# Altium PCB Lower1.1.PcbDoc (part 2 of 2)
Units mil, origin at the board's own origin, x right, y up, seen from the top; angles counter-clockwise.
Board outline 3366.33 x 5314.96 mil, 2 copper layers (Top Layer, Bottom Layer); 114 components, 117 nets, 417 pads, 111 vias.
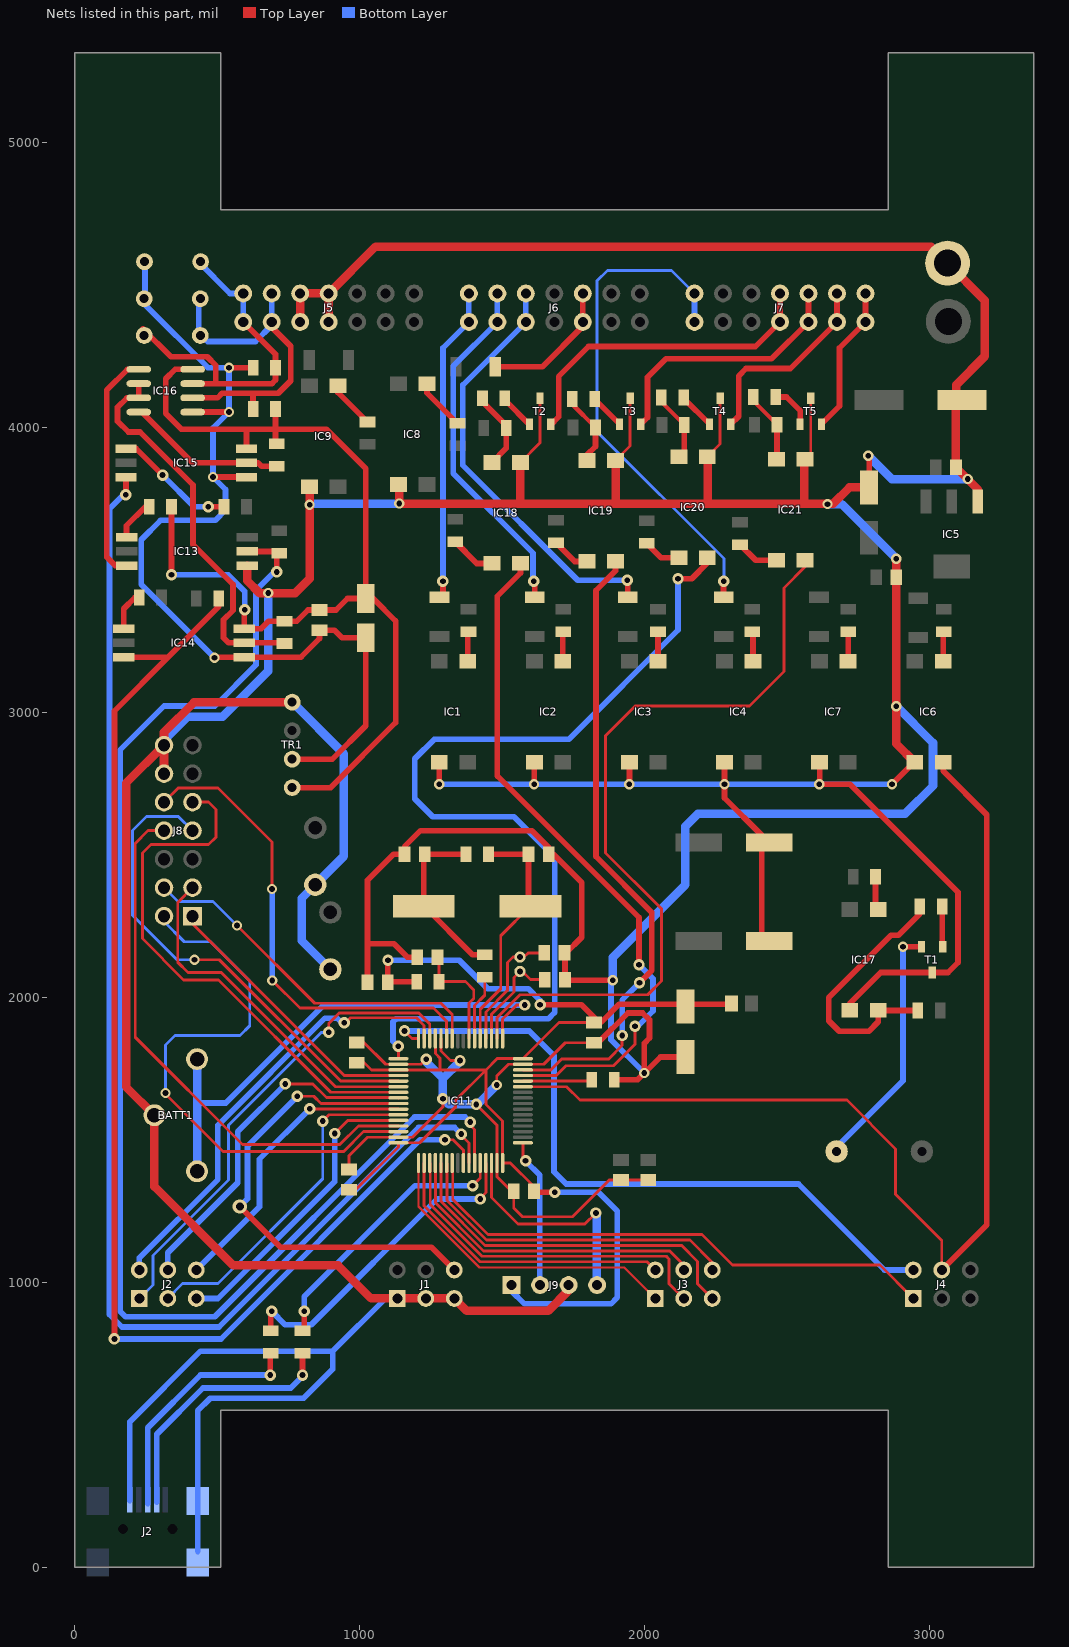
[diagram p2: the nets of this part, all layers, seen from the top]

## Via types
v1: diameter 40, hole 20, Top Layer to Bottom Layer, tented both sides, 64 vias
v2: diameter 36, hole 20, Top Layer to Bottom Layer, tented both sides, 46 vias
v3: diameter 50, hole 28, Top Layer to Bottom Layer, tented both sides, 1 vias

## Nets (pads, with @x,y where several pads share a name; then routed paths per layer and width w, separated by ;. In a path a pad name is that pad's centre, name@x,y a point inside that pad or via, vN(x,y) a via of type N, cw(c..) or ccw(c..) an arc to the next point about the centre after c; other vN are vias at no path point) (continued)
GND: B2.1 BATT1.2 C1.2 C2.2 C3.2 C4.2 C5.1 C6.2 C7.2 C8.2 C9.2 C10.2 C11.1 C12.1 C13.2 C14.2 C17.2 C18.2 C19.2 C20.2 C21.2 C22.2 C23.2 IC1.3 IC2.3 IC3.3 IC4.3 IC5.1 IC6.3 IC7.3 IC8.3 IC9.3 IC11.12 IC11.18 IC11.31 IC11.47 IC11.63 IC13.4 IC17.3 IC18.3 IC19.3 IC20.3 IC21.3 J1.1 J1.3 J1.5 J2.5@192.91,236.22 J2.6@431.1,15.75 J2.6@431.1,232.28 J5.5 J5.6 J5.7 J5.8 J8.12 J8.14 J9.3 R12.1 T1.3 T2.3 T3.3 T4.3 T5.3 TR1.1 | length 29514.4
  Top Layer w10: C8.2@962,1395.43 962,1444 1027.05,1509.05 IC11.31@1135.5,1509.05 1185.05,1509.05 1292,1616 v1(1292,1644) ; C21.2@994,1843.43 1012.57,1843.43 1091.05,1764.95 IC11.18@1135.5,1764.95 1214.95,1764.95 v1(1233,1783) ; IC11.12@1285.1,1855.5 1285.1,1811.21 1318.31,1778 v1(1352,1778) ; v1(1409,1624) 1481.95,1551.05 IC11.47@1481.95,1418.5 1481.95,1370.05 C7.2@1536.78,1315.22 ; v2(1481,1692) 1481,1724 1521.95,1764.95 IC11.63@1572.5,1764.95 1645.95,1764.95 1721.57,1840.57 C10.2@1822,1840.57 C10.2@1836.57,1840.57 ; C7.2@1540.57,1319 1540.57,1260.43 1571,1230 1747,1230 1875.57,1358.57 C23.2@1917,1358.57 C22.2@2013,1358.57 ; IC18.3@1564,3877.17 1633,3946.17 T2.3@1633,4102.28 ; IC19.3@1898,3884.17 1949,3935.17 T3.3@1949,4102.28 ; IC20.3@2220,3897.17 2265,3942.17 T4.3@2265,4102.28 ; IC21.3@2563,3888.17 2583,3908.17 T5.3@2583,4102.28
  Top Layer w20: C9.2@1027.57,2053 1027.57,2410.57 1119,2502 C14.2@1157.57,2502 1157.57,2529.57 1213,2585 1604,2585 1663.43,2525.57 C11.1@1663.43,2502 1680,2502 1779,2403 1779,2211 1724,2156 C13.2@1718.43,2156 1720.43,2154 C12.1@1720.43,2062 1722.43,2060 v2(1888,2060) ; 1032,2188 1120,2188 1167,2141 C5.1@1201.57,2141 ; IC8.3@1136,3799.83 IC8.3@1139,3796.83 ; v2(1139,3733) 1147,3733 v2@1148,3732 ; v2(1279,2748) IC1.3@1279,2824.83 ; 1564,3736 1568,3732 ; v2(1612,2748) 1612.8,2748.8 IC2.3@1612.8,2824.83 ; C10.2@1836.57,1840.57 1941,1945 1993,1945 2017,1921 2017,1857 1999,1839 v2(1999,1734) ; R12.1@1893.37,1711 1976,1711 v2(1999,1734) ; 1898,3733 1899,3732 ; v2(1946,2748) 1946.6,2748.6 IC3.3@1946.6,2824.83 ; C6.2@2143,1790.42 2055.42,1790.42 v2(1999,1734) ; IC20.3@2220,3897.17 IC20.3@2221,3896.17 ; IC4.3@2280.4,2824.83 2280.4,2699.6 2411.02,2568.98 C20.2@2411.02,2196 ; IC21.3@2560,3885.17 IC21.3@2563,3888.17 ; IC7.3@2614.2,2824.83 2614.2,2749.2 v2(2613,2748) 2721,2748 3100,2369 3100,2122 3064.72,2086.72 T1.3@3009,2086.72 2828.72,2086.72 2720,1978 IC17.3@2720,1953.83 ; v2(2785,3901) 2788,3898 C3.2@2788,3789.58 ; v2(2868,2748) 2944.83,2824.83 IC6.3@2948,2824.83
  Top Layer w30: J8.12@313,2785 J8.14@313,2885 ; IC13.4@604.42,3515 604.42,3462.58 649,3418 773,3418 824,3469 v2(824,3729) IC9.3@824,3791.83 ; TR1.1@763,3035 418,3035 313,2930 J8.14@313,2885 ; J5.5@791,4370.47 J5.6@791,4470.47 J5.8@891,4470.47 ; J5.7@891,4370.47 J5.8@891,4470.47 ; v2(1139,3733) IC8.3@1139,3796.83 ; v2@1148,3732 1568,3732 1899,3732 2221,3732 ; 1564,3736 IC18.3@1564,3877.17 ; J9.3@1732,998 1732,970 1662,900 1374.92,900 J1.5@1331.92,943 J1.3@1231.92,943 J1.1@1131.92,943 1040,943 924,1059 556,1059 279.39,1335.61 BATT1.2@279.39,1586.15 180,1685.54 180,2752 J8.14@313,2885 ; 1898,3733 IC19.3@1898,3884.17 ; IC20.3@2221,3896.17 2221,3732 ; IC21.3@2560,3885.17 2560,3732 ; C3.2@2788,3789.58 2718.58,3789.58 2661,3732 2560,3732 ; v2(2883.43,3539.57) C4.2@2883.43,3474 2883.43,2889.4 IC6.3@2948,2824.83 ; IC5.1@3168.55,3740.17 3168.55,3783.88 C2.2@3092.43,3860 3092.43,4074.76 C1.2@3113.67,4096 3094,4115.67 3094,4150 3194,4250 3194,4446 B2.1@3063,4577 3005,4635 1055.53,4635 J5.8@891,4470.47 ; 2221,3732 2560,3732
  Bottom Layer w10: J1.1@1131.92,921.92 J1.1@1131.92,943 ; v1@1233,1774 v1(1233,1783) ; v1(1409,1624) v1@1413,1624
  Bottom Layer w15: v2@1882,2054 v2(1888,2060)
  Bottom Layer w20: J2.5@192.91,233 192.91,248.03 192.91,509.91 441,758 905,758 ; J8.14@313,2885 J8.14@313,2902 ; J2.6@431.1,54.53 431.1,244.1 431.1,549.1 475,593 803,593 905,695 905,758 ; v2(824,3729) v2@828,3733 ; J1.1@1131.92,943 1090,943 905,758 ; v2(1279,2748) v2(1612,2748) v2(1946,2748) v2(2280,2748) v2(2613,2748) v2(2868,2748) ; v2@1882,2054 1882,1851 v2(1999,1734)
  Bottom Layer w30: J8.14@313,2902 395.5,2984.5 518.5,2984.5 679,3145 v2(679,3419) ; TR1.1@763,3036 944,2855 944,2495 C17.2@844,2395 796,2347 796,2199 C18.2@897,2098 ; v2@828,3733 v2(1139,3733) ; v1@1233,1774 1292,1715 ; v1@1349,1772 1292,1715 ; v1(1409,1624) 1312,1624 v1(1292,1644) 1292,1715 ; v1@1413,1624 v2(1481,1692) ; v2(1888,2060) 1888,2140 2142.5,2394.5 2142.5,2599.5 2187,2644 2914,2644 3012,2742 3012,2893 v2(2883,3022) ; v2(2642,3731) 2692,3731 v2(2883.43,3539.57) ; v2(2785,3901) 2867,3819 v2(3134,3819)
GND24: 
GND485: C15.2 C16.2 IC14.4 IC15.4 IC16.5 MOV2.1 MOV3.1 R27.2 TR1.3 | length 3473.6
  Top Layer w10: v2(490,3192) v2@492,3194
  Top Layer w20: IC16.5@413.49,4054 v2(541,4054) ; v2(485,3826) IC15.4@602.42,3826 ; v2@492,3194 IC14.4@594.42,3194 794,3194 859,3259 C16.2@859,3288.57 911.43,3288.57 937.9,3262.1 C15.2@1021,3262.1 1021,2953 904,2836 TR1.3@763,2836 ; v2(541,4210) R27.2@625.63,4210
  Bottom Layer w20: MOV2.1@239.57,4570 246,4563.57 246,4431 467,4210 v2(541,4210) v2(541,4054) 485,3998 v2(485,3826) 529,3782 529,3710 493,3674 301,3674 233,3606 233,3449 v2(490,3192)
IN_1: D1.1 J6.1 J6.2 | length 1101.2
  Top Layer w20: D1.1@1280,3403.9 1292,3415.9 v1(1292,3460)
  Bottom Layer w20: v1@1292,3468 1292,4279.47 J6.1@1383,4370.47 J6.2@1383,4470.47
IN_2: D2.1 J6.3 J6.4 | length 1256
  Top Layer w20: v1(1611,3460) 1614,3457 D2.1@1614,3403.9
  Bottom Layer w20: J6.4@1483,4470.47 J6.3@1483,4370.47 1328,4215.47 1328,3839 1608,3559 v1@1608,3452
IN_3: D3.1 J6.5 J6.6 | length 1508.4
  Top Layer w20: v1(1939,3464) 1941,3462 D3.1@1941,3403.9
  Bottom Layer w10: J6.6@1583,4470.47 J6.6@1583,4479
  Bottom Layer w20: J6.6@1583,4470.47 J6.5@1583,4370.47 1362,4149.47 1362,3867 1765,3464 v1(1939,3464)
IN_4: D4.1 J7.1 J7.2 | length 1786.1
  Top Layer w20: D4.1@2277,3403.9 2277,3459 v1(2278,3460)
  Bottom Layer w10: J7.2@2175,4470.47 2094.47,4551 1869,4551 1833,4515 1833,3985 2278,3540 v1(2278,3460)
  Bottom Layer w20: J7.1@2175,4370.47 J7.2@2175,4470.47
LCD_BL: IC11.39 J4.1 | length 1889.2
  Top Layer w10: IC11.39@1324.47,1418.5 1326.25,1416.72 1326.25,1290.83 1450.08,1167 2201,1167 2308,1060 2826,1060 J4.1@2943,943
LCD_D1: IC11.33 J3.1 | length 1117.6
  Top Layer w8: IC11.33@1206.36,1418.5 1206.36,1265.64 1420,1052 1928.46,1052 J3.1@2037.46,943
LCD_D2: IC11.34 J3.2 | length 1054.8
  Top Layer w10: IC11.34@1226.05,1418.5 1226.05,1268.58 1422.63,1072 2008.46,1072 J3.2@2037.46,1043
LCD_D3: IC11.35 J3.3 | length 1223.9
  Top Layer w10: IC11.35@1245.73,1418.5 1247.51,1416.72 1247.51,1272.49 1429,1091 1447,1091 2076,1091 2086,1081 2086,994.46 J3.3@2137.46,943
LCD_D4: IC11.36 J3.4 | length 1119.8
  Top Layer w10: IC11.36@1265.42,1418.5 1265.42,1278.62 1434.04,1110 2088,1110 2137.46,1060.54 J3.4@2137.46,1043
LCD_E: IC11.37 J3.5 | length 1274.2
  Top Layer w10: IC11.37@1285.1,1418.5 1285.1,1283.9 1440,1129 1467,1129 2130,1129 2186,1073 2186,994.46 J3.5@2237.46,943
LCD_RS: IC11.38 J3.6 | length 1180
  Top Layer w10: IC11.38@1304.79,1418.5 1306.57,1416.72 1306.57,1286.48 1445.04,1148 1477,1148 2159,1148 2237.46,1069.54 J3.6@2237.46,1043
LED_AUTO: IC11.24 J2.4@326.38,1043 | length 1240.8
  Top Layer w10: v1(739,1696) 835,1696 883,1648 1134.34,1648 IC11.24@1135.5,1646.84
  Bottom Layer w20: J2.4@326.38,1043 326.38,1103.38 572,1349 572,1529 v1(739,1696)
LED_Fault: IC11.28 J2.5@426.38,943 | length 1067
  Top Layer w10: v1(912,1522) 958.1,1568.1 IC11.28@1135.5,1568.1
  Bottom Layer w20: J2.5@426.38,943 502,943 912,1353 v1(912,1522)
LED_Healty: IC11.16 J4.2 | length 2432.3
  Top Layer w10: v1(1157,1882) 1183.5,1855.5 IC11.16@1206.36,1855.5
  Bottom Layer w20: v1(1157,1882) 1595,1882 1682,1795 1682,1388 1725,1345 2540,1345 2842,1043 J4.2@2943,1043
LED_MANUAL: IC11.25 J1.6 | length 1680.5
  Top Layer w10: v1(781,1652.5) 838.5,1652.5 863.84,1627.16 IC11.25@1135.5,1627.16
  Top Layer w20: v3(579,1266) 722,1123 1251.92,1123 J1.6@1331.92,1043
  Bottom Layer w20: v3(579,1266) 606,1293 606,1477.5 v1(781,1652.5)
LED_OUT1: IC11.26 J2.6@426.38,1043 | length 1042.2
  Top Layer w10: v1(825,1609) 826.53,1607.47 IC11.26@1135.5,1607.47
  Bottom Layer w20: J2.6@426.38,1043 648,1264.62 648,1432 v1(825,1609)
LED_OUT2: IC11.27 J2.3@326.38,943 | length 1194.8
  Top Layer w10: v1(870,1565.5) 892.29,1587.79 IC11.27@1135.5,1587.79
  Bottom Layer w10: J2.3@326.38,943 378.38,995 502,995 870,1363 v1(870,1565.5)
LED_S1: IC11.14 J2.1@226.38,943 | length 1692.4
  Top Layer w10: v1(891,1877) 891,1908 928,1945 1207,1945 1245.73,1906.27 IC11.14@1245.73,1855.5
  Bottom Layer w10: J2.1@226.38,943 274,990.62 274,1094 539,1359 539,1551 865,1877 v1(891,1877)
LED_S2: IC11.15 J2.2@226.38,1043 | length 1577.9
  Top Layer w10: v1(946,1911) 946,1907 967,1928 1199,1928 1226.05,1900.95 IC11.15@1226.05,1855.5
  Bottom Layer w10: v1@936,1911 v1(946,1911)
  Bottom Layer w20: J2.2@226.38,1043 226.38,1085.38 502,1361 502,1551 878,1927 920,1927 v1@936,1911
man_auto: IC6.4 IC11.59 J4.4 | length 3801.6
  Top Layer w10: IC11.59@1572.5,1686.21 1725.79,1686.21 1773,1639 2710,1639 2881,1468 2881,1309 3043,1147 J4.4@3043,1043
  Top Layer w20: J4.4@3043,1043 3201,1201 3201,2641 3048,2794 IC6.4@3048,2824.83
MCU_VCC: C6.1 C7.1 C8.1 C9.1 C10.1 C21.1 IC11.13 IC11.19 IC11.32 IC11.48 IC11.64 J9.1 L1.2 R11.2 | length 4799
  Top Layer w10: C8.1@962,1324.57 985.57,1324.57 1135.5,1474.5 IC11.32@1135.5,1489.36 1210.36,1489.36 1337,1616 1337,1639 1443.27,1745.27 ; C21.1@994,1772.57 1013.43,1772.57 1040.73,1745.27 IC11.19@1135.5,1745.27 1282,1745.27 ; C9.1@1098.43,2053 C9.1@1100.43,2055 ; v1@1098.43,2129.43 v1(1099,2130) ; IC11.13@1265.42,1855.5 1265.42,1802.58 1282,1786 1282,1745.27 ; 1443.01,1703.27 1443.27,1703.27 ; C7.1@1614.43,1316 C7.1@1611.43,1319 1611.43,1335.57 1528.5,1418.5 IC11.48@1501.64,1418.5 1501.64,1565.36 1443.27,1623.73 1443.27,1703.27 ; C10.1@1846.57,1912 1824,1912 1699.87,1912 IC11.64@1572.5,1784.64 1482.64,1784.64 1443.27,1745.27 ; L1.2@2302.15,1975.58 L1.2@2304.57,1978 ; 1282,1745.27 1443.27,1745.27 ; 1443.27,1703.27 1443.27,1745.27
  Top Layer w20: C9.1@1098.43,2053 v1@1098.43,2129.43 ; C9.1@1100.43,2055 R11.2@1199.63,2055 ; C7.1@1614.43,1316 v1(1684,1316) ; v1(1633,1974) 1778,1974 1824,1928 C10.1@1824,1912 ; C10.1@1846.57,1912 1910.15,1975.58 L1.2@2302.15,1975.58
  Bottom Layer w10: v1@1633,1966 v1(1633,1974)
  Bottom Layer w20: v1(1099,2130) 1349,2130 1449,2030 1592,2030 1633,1989 v1(1633,1974) ; J9.1@1532,998 1532,970 1578,924 1882,924 1904,946 1904,1250 1838,1316 v1(1684,1316)
NetIC1_1: IC1.1 R1.1 | length 105.7
  Top Layer w10: R1.1@1379,3280.63 R1.1@1382,3283.63
  Top Layer w20: IC1.1@1379,3179.17 R1.1@1379,3280.63
NetIC2_1: IC2.1 R2.1 | length 105
  Top Layer w10: R2.1@1712.8,3282.43 R2.1@1714,3283.63
  Top Layer w20: IC2.1@1712.8,3179.17 R2.1@1712.8,3282.43
NetIC3_1: IC3.1 R3.1 | length 104.6
  Top Layer w10: R3.1@2046.6,3283.23 R3.1@2047,3283.63
  Top Layer w20: IC3.1@2046.6,3179.17 R3.1@2046.6,3283.23
NetIC4_1: IC4.1 R4.1 | length 105.5
  Top Layer w10: R4.1@2378,3283.63 R4.1@2380.4,3281.23
  Top Layer w20: IC4.1@2380.4,3179.17 R4.1@2380.4,3281.23
NetIC6_1: IC6.1 R7.1 | length 105.3
  Top Layer w10: R7.1@3048,3281.63 R7.1@3050,3283.63
  Top Layer w20: IC6.1@3048,3179.17 R7.1@3048,3281.63
NetIC7_1: IC7.1 R8.1 | length 104.8
  Top Layer w10: R8.1@2714.2,3282.83 R8.1@2715,3283.63
  Top Layer w20: IC7.1@2714.2,3179.17 R8.1@2714.2,3282.83
NetIC8_1: IC8.1 R9.1 | length 184.1
  Top Layer w20: IC8.1@1236,4154.17 1236,4121.37 R9.1@1343,4014.37
NetIC9_1: IC9.1 R10.1 | length 169.5
  Top Layer w10: IC9.1@924,4122.37 IC9.1@924,4146.17
  Top Layer w20: IC9.1@924,4122.37 R10.1@1027,4019.37
NetIC10_1: BATT1.1 BATT1.3 IC11.1 | length 1853.4
  Top Layer w10: IC11.1@1501.64,1855.5 1501.64,1923.55 1520.52,1942.44 1520.52,1942.52 1551,1973 v1(1579,1973)
  Bottom Layer w10: 429,1626 432,1629
  Bottom Layer w20: 432,1629 529.89,1629 873.89,1973 v1(1579,1973)
  Bottom Layer w30: BATT1.3@429,1389.3 429,1626 BATT1.1@429,1783
NetIC11_6: IC11.6 R13.2 | length 229.9
  Top Layer w10: IC11.6@1403.21,1855.5 1403.21,1971.21 1439,2007 R13.2@1439,2070.63
NetIC11_60: IC11.60 R12.2 | length 250.5
  Top Layer w10: IC11.60@1572.5,1705.9 R12.2@1823,1705.9
NetIC13_1: IC13.1 R19.1 | length 147.1
  Top Layer w20: IC13.1@181.58,3615 181.58,3655.58 248,3722 R19.1@260.63,3722
NetIC13_3: IC13.3 IC16.1 | length 810.8
  Top Layer w10: IC16.1@185,4204 IC16.1@224.51,4204
  Top Layer w20: IC13.3@181.58,3515 142,3515 112,3545 112,4131 IC16.1@185,4204
NetIC14_1: IC14.1 R17.1 | length 140
  Top Layer w10: R17.1@211,3403 R17.1@225.63,3403
  Top Layer w20: IC14.1@171.58,3294 171.58,3363.58 R17.1@211,3403
NetIC14_5: IC14.5 IC16.2 IC16.3 R20.1 | length 1375.1
  Top Layer w10: IC16.3@183,4104 IC16.3@224.51,4104 ; R20.1@733.63,3244 R20.1@736,3241.63
  Top Layer w20: IC16.3@183,4104 150,4071 150,4022 188,3984 229,3984 415,3798 415,3589 555,3449 555,3358 522,3325 522,3262 540,3244 IC14.5@594.42,3244 R20.1@733.63,3244 ; IC16.3@224.51,4104 IC16.2@224.51,4154
NetIC15_1: IC15.1 R18.1 | length 428.5
  Top Layer w10: IC15.1@179.58,3926 IC15.1@215,3926
  Top Layer w20: IC15.1@215,3926 v1(308,3833) ; v1(468,3722) R18.1@523.63,3722
  Bottom Layer w20: v1(308,3833) 419,3722 v1(468,3722)
NetIC15_5: IC15.5 IC16.4 R21.1 | length 563.3
  Top Layer w10: IC16.4@224.51,4054 IC16.4@235,4054
  Top Layer w20: IC16.4@235,4054 413,3876 IC15.5@602.42,3876 643,3876 655.37,3863.63 R21.1@709,3863.63
NetIC17_1: IC17.1 R22.1 | length 118.8
  Top Layer w10: IC17.1@2810.37,2317.8 IC17.1@2820,2308.17
  Top Layer w20: IC17.1@2810.37,2317.8 R22.1@2810.37,2423
NetIC17_4: IC17.4 R29.1 R30.2 | length 930.4
  Top Layer w10: R29.1@2958.46,1953.83 R29.1@2958.63,1954 ; R30.2@2965.63,2292.63 R30.2@2965.63,2319
  Top Layer w20: R29.1@2958.46,1953.83 IC17.4@2820,1953.83 2820,1914 2787,1881 2683,1881 2646,1918 2646,1999.37 2864.63,2218 2891,2218 R30.2@2965.63,2292.63
NetIC18_1: IC18.1 R23.1 | length 160.4
  Top Layer w20: R23.1@1335,3598.63 1410.8,3522.83 IC18.1@1464,3522.83
NetIC18_4: IC18.4 R31.1 R35.2 | length 281.4
  Top Layer w10: R35.2@1430.63,4090.37 R35.2@1430.63,4103
  Top Layer w20: R35.2@1430.63,4090.37 1514.37,4006.63 R31.1@1514.37,3998 1514.37,3927.54 IC18.4@1464,3877.17
NetIC19_1: IC19.1 R24.1 | length 136.3
  Top Layer w20: R24.1@1689,3595.63 1754.8,3529.83 IC19.1@1798,3529.83
NetIC19_4: IC19.4 R32.1 R36.2 | length 261.9
  Top Layer w10: R36.2@1745.63,4081.74 R36.2@1745.63,4100 ; IC19.4@1798,3884.17 IC19.4@1798,3904
  Top Layer w15: R36.2@1745.63,4081.74 R32.1@1827.37,4000
  Top Layer w20: IC19.4@1798,3904 1827.37,3933.37 R32.1@1827.37,4000
NetIC20_1: IC20.1 R25.1 | length 134
  Top Layer w20: R25.1@2007,3593.63 2057.8,3542.83 IC20.1@2120,3542.83
NetIC20_4: IC20.4 R33.1 R37.2 | length 249.3
  Top Layer w10: IC20.4@2120,3897.17 IC20.4@2139.37,3916.54
  Top Layer w15: R37.2@2058.63,4089.74 R33.1@2139.37,4009
  Top Layer w20: R37.2@2058.63,4089.74 R37.2@2058.63,4105 ; IC20.4@2139.37,3916.54 R33.1@2139.37,4009
NetIC21_1: IC21.1 R26.1 | length 150.7
  Top Layer w20: R26.1@2335,3588.63 2389.8,3533.83 IC21.1@2463,3533.83
NetIC21_4: IC21.4 R34.1 R38.2 | length 253.7
  Top Layer w8: IC21.4@2463,3888.17 IC21.4@2464.37,3889.54
  Top Layer w15: R38.2@2381.63,4092.74 R34.1@2464.37,4010
  Top Layer w20: R38.2@2381.63,4092.74 R38.2@2381.63,4107 ; IC21.4@2464.37,3889.54 R34.1@2464.37,4010
NetJ2_2: J2.2@287.4,236.22 R5.2 | length 911
  Top Layer w20: v1(799,674) R5.2@799,750.63
  Bottom Layer w20: J2.2@287.4,228 J2.2@287.4,236.22 287.4,466.4 450,629 758,629 v1@799,670
NetJ2_3: J2.3@255.91,236.22 R6.2 | length 856.1
  Top Layer w10: R6.2@686,753.63 R6.2@688,755.63
  Top Layer w20: v1(686,674) R6.2@686,753.63
  Bottom Layer w20: J2.3@255.91,222 255.91,248.03 255.91,488.91 441,674 v1(686,674)
NetLS1_2: LS1.2 T1.2 | length 871.3
  Top Layer w20: v2(2907,2177) 2971.32,2177 T1.2@2971.6,2177.28
  Bottom Layer w20: LS1.2@2669,1469 2907,1707 v2(2907,2177)
NetR30_1: R30.1 T1.1 | length 142.6
  Top Layer w10: T1.1@3044.37,2179.31 T1.1@3046.4,2177.28
  Top Layer w20: T1.1@3044.37,2179.31 R30.1@3044.37,2319
NetR35_1: R35.1 T2.1 | length 129
  Top Layer w10: R35.1@1509.37,4095.95 R35.1@1509.37,4103
  Top Layer w20: R35.1@1509.37,4095.95 T2.1@1595.6,4009.72
NetR36_1: R36.1 T3.1 | length 124.4
  Top Layer w10: T3.1@1911.6,4011.72 T3.1@1911.6,4012.77
  Top Layer w20: R36.1@1824.37,4100 T3.1@1911.6,4012.77
NetR37_1: R37.1 T4.1 | length 130.6
  Top Layer w10: R37.1@2137.37,4101.95 R37.1@2137.37,4105
  Top Layer w20: R37.1@2137.37,4101.95 T4.1@2227.6,4011.72
NetR38_1: R38.1 T5.1 | length 152.6
  Top Layer w20: R38.1@2460.37,4107 2498,4107 2545.6,4059.4 T5.1@2545.6,4011.72
NetR39_1: 
OSC1: C11.2 IC11.5 Q2.2 R16.1 | length 862.8
  Top Layer w10: IC11.5@1422.9,1855.5 1422.9,1957.9 1495,2030 1495,2216.32 Q2.2@1599.01,2320.33 Q2.2@1592.57,2326.77
  Top Layer w20: R16.1@1451.84,2502 C11.2@1592.57,2502 Q2.2@1592.57,2326.77
OSC2: C14.1 Q2.1 R13.1 R16.2 | length 613.9
  Top Layer w10: C14.1@1224.99,2499.88 C14.1@1228.43,2503.33
  Top Layer w20: C14.1@1224.99,2499.88 Q2.1@1224.99,2320.33 1395.95,2149.37 R13.1@1439,2149.37 ; C14.1@1228.43,2502 R16.2@1373.1,2502
OSC32_1: C12.2 IC11.3 Q1.1 | length 376.4
  Top Layer w10: IC11.3@1462.27,1855.5 1462.27,1940.27 1541,2019 1541,2070 Q1.1@1562,2091 1570.32,2091 1599.32,2062 C12.2@1649.57,2062
OSC32_2: C13.1 IC11.4 Q1.2 | length 440.8
  Top Layer w10: IC11.4@1442.58,1855.5 1442.58,1948.58 1519,2025 1519,2122 1538,2141 Q1.2@1562,2141 1576.31,2141 1591.31,2156 C13.1@1647.57,2156
Relay_Fault1: J7.11 J7.12 T4.2 | length 704.2
  Top Layer w20: T4.2@2302.4,4011.72 2330,4039.32 2330,4181 2356,4207 2511.53,4207 J7.11@2675,4370.47 J7.12@2675,4470.47
Relay_Fault2: J7.13 J7.14 T5.2 | length 522.8
  Top Layer w20: T5.2@2620.4,4011.72 2684,4075.32 2684,4279.47 J7.13@2775,4370.47 J7.14@2775,4470.47
Relay_S1: J7.7 J7.8 T2.2 | length 1137
  Top Layer w20: T2.2@1670.4,4009.72 1698,4037.32 1698,4179 1803,4284 2388.53,4284 J7.7@2475,4370.47 J7.8@2475,4470.47
Relay_S2: J7.9 J7.10 T3.2 | length 919.6
  Top Layer w20: T3.2@1986.4,4011.72 2010,4035.32 2010,4176 2075,4241 2445.53,4241 J7.9@2575,4370.47 J7.10@2575,4470.47
Relayfault1: IC11.17 IC20.2 | length 3413.9
  Top Layer w10: v1(1135,1828) 1135.5,1827.5 IC11.17@1135.5,1784.64
  Top Layer w20: v1(2117,3469) 2165,3469 2220,3524 IC20.2@2220,3542.83
  Bottom Layer w20: v1(1135,1828) 1117,1846 1117,1914 1128,1925 1662,1925 1684,1947 1684,2491 1541,2634 1256,2634 1193,2697 1193,2837 1262,2906 1734,2906 2117,3289 v1(2117,3469)
Relayfault2: IC11.2 IC21.2 | length 2785.8
  Top Layer w10: IC11.2@1481.95,1855.5 1481.95,1927.99 1543.96,1990 1544.04,1990 1563.04,2009 2011,2009 2059,2057 2059,2311 1863,2507 1863,2918 1967,3022 2368,3022 2489,3143 2489,3437 2563,3511 IC21.2@2563,3533.83
Reset: C5.2 IC11.7 R11.1 | length 399.4
  Top Layer w10: C5.2@1272.43,2141 1278.37,2135.06 R11.1@1278.37,2055 1371,2055 1400,2026 1400,1996 1383.53,1979.53 IC11.7@1383.53,1855.5
RS485_A: IC16.7 J5.1 J5.2 MOV1.1 MOV2.2 R27.1 | length 1218.9
  Top Layer w20: MOV1.1@239.57,4346 337.57,4248 465,4248 495,4218 495,4154 ; IC16.7@413.49,4154 495,4154 ; J5.1@591,4370.47 704.37,4257.1 R27.1@704.37,4210 704.37,4166.37 692,4154 495,4154
  Bottom Layer w20: MOV2.2@436.43,4578.57 544.53,4470.47 J5.2@591,4470.47 J5.1@591,4370.47
RS485_B: IC16.6 J5.3 J5.4 MOV1.2 MOV3.2 R28.2 | length 1181.6
  Top Layer w10: J5.3@691,4352 J5.3@691,4370.47
  Top Layer w20: IC16.6@413.49,4104 501,4104 517,4120 625,4120 ; R28.2@625.63,4065 625.63,4119.37 625,4120 ; J5.3@691,4352 758,4285 758,4164 714,4120 625,4120
  Bottom Layer w20: MOV3.2@435.43,4452 435.43,4347 436.43,4346 436.43,4331.57 466,4302 634,4302 691,4359 J5.3@691,4370.47 J5.4@691,4470.47
RS485_direct: IC11.41 IC14.3 R15.1 | length 4481.5
  Top Layer w10: v1(1299,1500) 1327,1500 1363.84,1463.16 IC11.41@1363.84,1418.5
  Top Layer w20: v1(139,801) 139,3005 328,3194 ; IC14.3@171.58,3194 328,3194 ; R15.1@505.37,3400 505.37,3371.37 328,3194
  Bottom Layer w20: v1(139,801) 513,801 1212,1500 v1(1299,1500)
RS485_Rx: IC11.43 IC13.5 R14.1 | length 4801
  Top Layer w10: R14.1@709,3550.63 R14.1@717,3558.63 R14.1@710.63,3565 ; v1(1388,1562) 1388,1551 1403.21,1535.79 IC11.43@1403.21,1418.5
  Top Layer w20: IC13.5@604.42,3565 R14.1@710.63,3565 ; v1(709,3493) R14.1@709,3550.63
  Bottom Layer w10: v1@700,3493 v1(709,3493)
  Bottom Layer w20: v1@700,3493 636,3429 636,3167 491.5,3022.5 313.5,3022.5 159,2868 159,898 178,879 491,879 1192,1580 1370,1580 v1(1388,1562)
RS485_Tx: IC11.42 IC15.3 | length 4626.9
  Top Layer w10: v1(179,3764) v1@179.58,3764.58 ; v1@1357,1515 1383.53,1488.47 IC11.42@1383.53,1418.5
  Top Layer w20: v1@179.58,3764.58 IC15.3@179.58,3826
  Bottom Layer w10: v1@171,3764 v1(179,3764)
  Bottom Layer w20: v1@171,3764 122,3715 122,895 122,886.66 165.66,843 506,843 1206,1543 1333,1543 v1(1356,1520)
S1_Select: IC11.61 IC18.2 | length 2417.8
  Top Layer w10: IC11.61@1572.5,1725.58 1689.58,1725.58 1724,1760 1891.04,1760 1966,1834.96 v1(1966,1898)
  Top Layer w20: IC18.2@1564,3522.83 1564,3489 1483,3408 1483,2777 1980,2280 v1(1980,2114)
  Bottom Layer w10: v1(1966,1898) v1@1975,1898
  Bottom Layer w20: v1@1975,1898 2029,1952 2029,2065 v1(1980,2114)
S2_Select: IC11.62 IC19.2 | length 2235.7
  Top Layer w10: IC11.62@1572.5,1745.27 1670.27,1745.27 1709,1784 1874,1784 1921,1831 v1(1921,1866)
  Top Layer w20: IC19.2@1898,3529.83 1898,3497 1829,3428 1829,2494 2025,2298 2025,2094 v1(1982,2051)
  Bottom Layer w20: v1(1921,1866) 1921,1990 v1(1982,2051)
SPI1_CS1: IC11.20 J8.1 | length 970
  Top Layer w10: J8.1@413,2285 413,2258 945.42,1725.58 IC11.20@1135.5,1725.58
SPI1_MISO: IC11.22 J8.3 | length 1239
  Top Layer w10: J8.3@413,2385 361,2333 361,2123 397,2087 514,2087 914.79,1686.21 IC11.22@1135.5,1686.21
SPI1_MOSI: IC11.23 J8.9 | length 1892.9
  Top Layer w10: J8.9@413,2685 469,2685 495,2659 495,2562 469,2536 267,2536 237,2506 237,2206 382,2061 504,2061 898.47,1666.53 IC11.23@1135.5,1666.53
SPI1_SCK: IC11.21 J8.7 | length 1724
  Top Layer w10: v2(420,2132) 507,2132 933.1,1705.9 IC11.21@1135.5,1705.9
  Bottom Layer w10: J8.7@413,2585 363,2635 252,2635 202,2585 202,2288 358,2132 v2(420,2132)
SPI2_CLK: IC11.29 J8.8 | length 1906.4
  Top Layer w10: J8.8@313,2585 257,2585 212,2540 212,1860 589,1483 930,1483 995.42,1548.42 IC11.29@1135.5,1548.42
SPI2_CS: IC11.30 J8.2 | length 1993
  Top Layer w10: v2(318,1664) 315,1664 520,1459 944,1459 1013.73,1528.73 IC11.30@1135.5,1528.73
  Bottom Layer w10: J8.2@313,2285 313,2266 384,2195 476,2195 614,2057 614,1900 580,1866 352,1866 318,1832 v2(318,1664)
SPI2_MISO: IC11.10 J8.4 | length 1280
  Top Layer w10: v2(569,2252) 842,1979 1285,1979 1324.47,1939.53 IC11.10@1324.47,1855.5
  Bottom Layer w10: J8.4@313,2385 362,2336 485,2336 v2(569,2252)
SPI2_MOSI: IC11.11 J8.10 | length 1696.5
  Top Layer w10: J8.10@313,2685 363,2735 502,2735 692,2545 v2(692,2380) ; v2(693,2059) 790,1962 1259,1962 1304.79,1916.21 IC11.11@1304.79,1855.5
  Bottom Layer w10: v2(692,2380) v2@693,2379
  Bottom Layer w20: v2(693,2059) v2@693,2379
SWCLK: IC11.49 J9.2 | length 516
  Top Layer w10: IC11.49@1572.5,1489.36 1572.5,1435.5 v1(1582,1426)
  Bottom Layer w20: v1(1582,1426) 1632,1376 J9.2@1632,998
SWDIO: IC11.46 J9.4 | length 788.7
  Top Layer w10: IC11.46@1462.27,1418.5 1462.27,1297.73 1556,1204 1790,1204 v1(1829,1243)
  Bottom Layer w30: v1(1829,1243) 1832,1240 J9.4@1832,998
UP_btn: D8.1 J6.9 J6.10 | length 481.4
  Top Layer w10: J6.9@1783,4355 J6.9@1783,4370.47
  Top Layer w20: D8.1@1475.9,4213 1641,4213 J6.9@1783,4355 ; J6.9@1783,4370.47 J6.10@1783,4470.47
USB_DM: IC11.44 R5.1 | length 965.9
  Top Layer w10: R5.1@799,829.37 R5.1@805,835.37 ; v1(1396,1339) 1422.9,1365.9 IC11.44@1422.9,1418.5
  Top Layer w20: R5.1@805,835.37 v1(805,898)
  Bottom Layer w20: v1(805,898) 805,950 1194,1339 v1(1396,1339)
USB_DP: IC11.45 R6.1 | length 1138.6
  Top Layer w10: v1@688,895 v1(691,898) ; v1(1423,1292) 1423,1295 1442.58,1314.58 IC11.45@1442.58,1418.5
  Top Layer w20: R6.1@688,829.37 v1@688,895
  Bottom Layer w20: v1(691,898) 738,851 830,851 1271,1292 v1(1423,1292)
VCC485: C15.1 C16.1 IC14.6 IC15.6 IC16.8 R19.2 R20.2 R21.2 R28.1 TR1.4 | length 3737.9
  Top Layer w10: v1@338,3483 v1(339.37,3483) ; v1@594.42,3358.42 v1(596,3360) ; 602.42,3990.42 606,3994 ; R21.2@704.37,3947 R21.2@709,3942.37 ; C15.1@1021,3399.9 C15.1@1034,3399.9
  Top Layer w20: v1(339.37,3483) R19.2@339.37,3722 ; IC16.8@413.49,4204 352,4204 319,4171 319,4049 374,3994 606,3994 703,3994 ; v1@594.42,3358.42 IC14.6@594.42,3294 654,3294 680.37,3320.37 R20.2@736,3320.37 779.37,3320.37 818.43,3359.43 C16.1@859,3359.43 916.43,3359.43 956.9,3399.9 C15.1@1021,3399.9 1021,3856 883,3994 704.37,3994 ; IC15.6@602.42,3926 602.42,3990.42 ; R21.2@704.37,3947 704.37,3994 ; R28.1@704.37,4065 704.37,3994 ; TR1.4@763,2736 898,2736 1126,2964 1126,3321 1047.1,3399.9 C15.1@1034,3399.9
  Bottom Layer w10: v1@338,3482 339,3483 v1(339.37,3483)
  Bottom Layer w20: v1(339.37,3483) 538,3483 596,3425 v1(596,3360)
pads on no net: D2.2 D3.2 D4.2 D5.2 D6.2 IC2.2 IC3.2 IC4.2 IC6.2 IC7.2 IC13.2 IC14.2 IC15.2 J2.1@317.91,236.22 J2.4@224.41,236.22 J2.6@80.71,15.75 J2.6@80.71,232.28 J2.MTG1 J2.MTG2

## Keep-outs
Keep-Out Layer:
  the board outline again, w12.01

## Silkscreen, mask and mechanical layers (free items; w line width, h text height)
Top Overlay:
  lines w8: 405,2085 528,2085 528,2285 528.35,2285
  text "+" at 748,2587 h40
  text "-" at 737,2352 h40
  text "+" at 791,2286 h40
  text "-" at 780,2051 h40
  text "BUZZER" at 2716,1506 h40
  text "+" at 3089,1427 h40
Mechanical 1:
  lines w25: 912,1522 912,1523
Mechanical 13:
  lines w7.87: 3555.39,1565 ccw(c3791.61,1565) 4027.83,1565 ccw(c3791.61,1565) 3555.39,1565
Mechanical 15:
  lines w3.94: 3516.02,1289.41 4067.2,1289.41 4067.2,1840.59 3516.02,1840.59 3516.02,1289.41

## Dimensions
0,5314.96 to 100,5280 on Mechanical 1
3366.33,0 to 3143,943 on Mechanical 1
3366.33,5314.96 to 3265,5295 on Mechanical 1

## Text inside footprints (layer, text, board x,y; h text height)
J1: Top Overlay "6" at 1391.92,1023 h40; Top Overlay "5" at 1391.92,923 h40; Top Overlay "1" at 1051.92,923 h40; Top Overlay "2" at 1051.92,1023 h40
J2: Top Overlay "6" at 486.38,1023 h40; Top Overlay "5" at 486.38,923 h40; Top Overlay "1" at 146.38,923 h40; Top Overlay "2" at 146.38,1023 h40
J3: Top Overlay "6" at 2297.46,1023 h40; Top Overlay "5" at 2297.46,923 h40; Top Overlay "1" at 1957.46,923 h40; Top Overlay "2" at 1957.46,1023 h40
J4: Top Overlay "6" at 3203,1023 h40; Top Overlay "5" at 3203,923 h40; Top Overlay "1" at 2863,923 h40; Top Overlay "2" at 2863,1023 h40
J5: Top Overlay "14" at 1256,4455.47 h40; Top Overlay "1" at 511,4350.47 h40; Mechanical 14 "14" at 1256,4455.47 h40; Mechanical 14 "1" at 511,4350.47 h40
J6: Top Overlay "14" at 2048,4455.47 h40; Top Overlay "1" at 1303,4350.47 h40; Mechanical 14 "14" at 2048,4455.47 h40; Mechanical 14 "1" at 1303,4350.47 h40
J7: Top Overlay "14" at 2840,4455.47 h40; Top Overlay "1" at 2095,4350.47 h40; Mechanical 14 "14" at 2840,4455.47 h40; Mechanical 14 "1" at 2095,4350.47 h40
TR1: Mechanical 14 "+Vout" at 813,2721.24 h29.53; Mechanical 14 "-Vout" at 813,2821.24 h29.53; Mechanical 14 "+Vin" at 813,2921.24 h29.53; Mechanical 14 "-Vin" at 813,3021.24 h29.53; Mechanical 14 "4" at 702.63,2721.24 h29.53; Mechanical 14 "1" at 707.55,3021.24 h29.53